# Altium PCB betaV2.1.PcbDoc (part 2 of 2)
Units mm, origin at the board's own origin, x right, y up, seen from the top; angles counter-clockwise.
Board outline 80.01 x 100.08 mm, 2 copper layers (Top Layer, Bottom Layer), stack 1.671 mm thick; 212 components, 112 nets, 564 pads, 132 vias.
Unrouted connection lines stored in the file: 45.
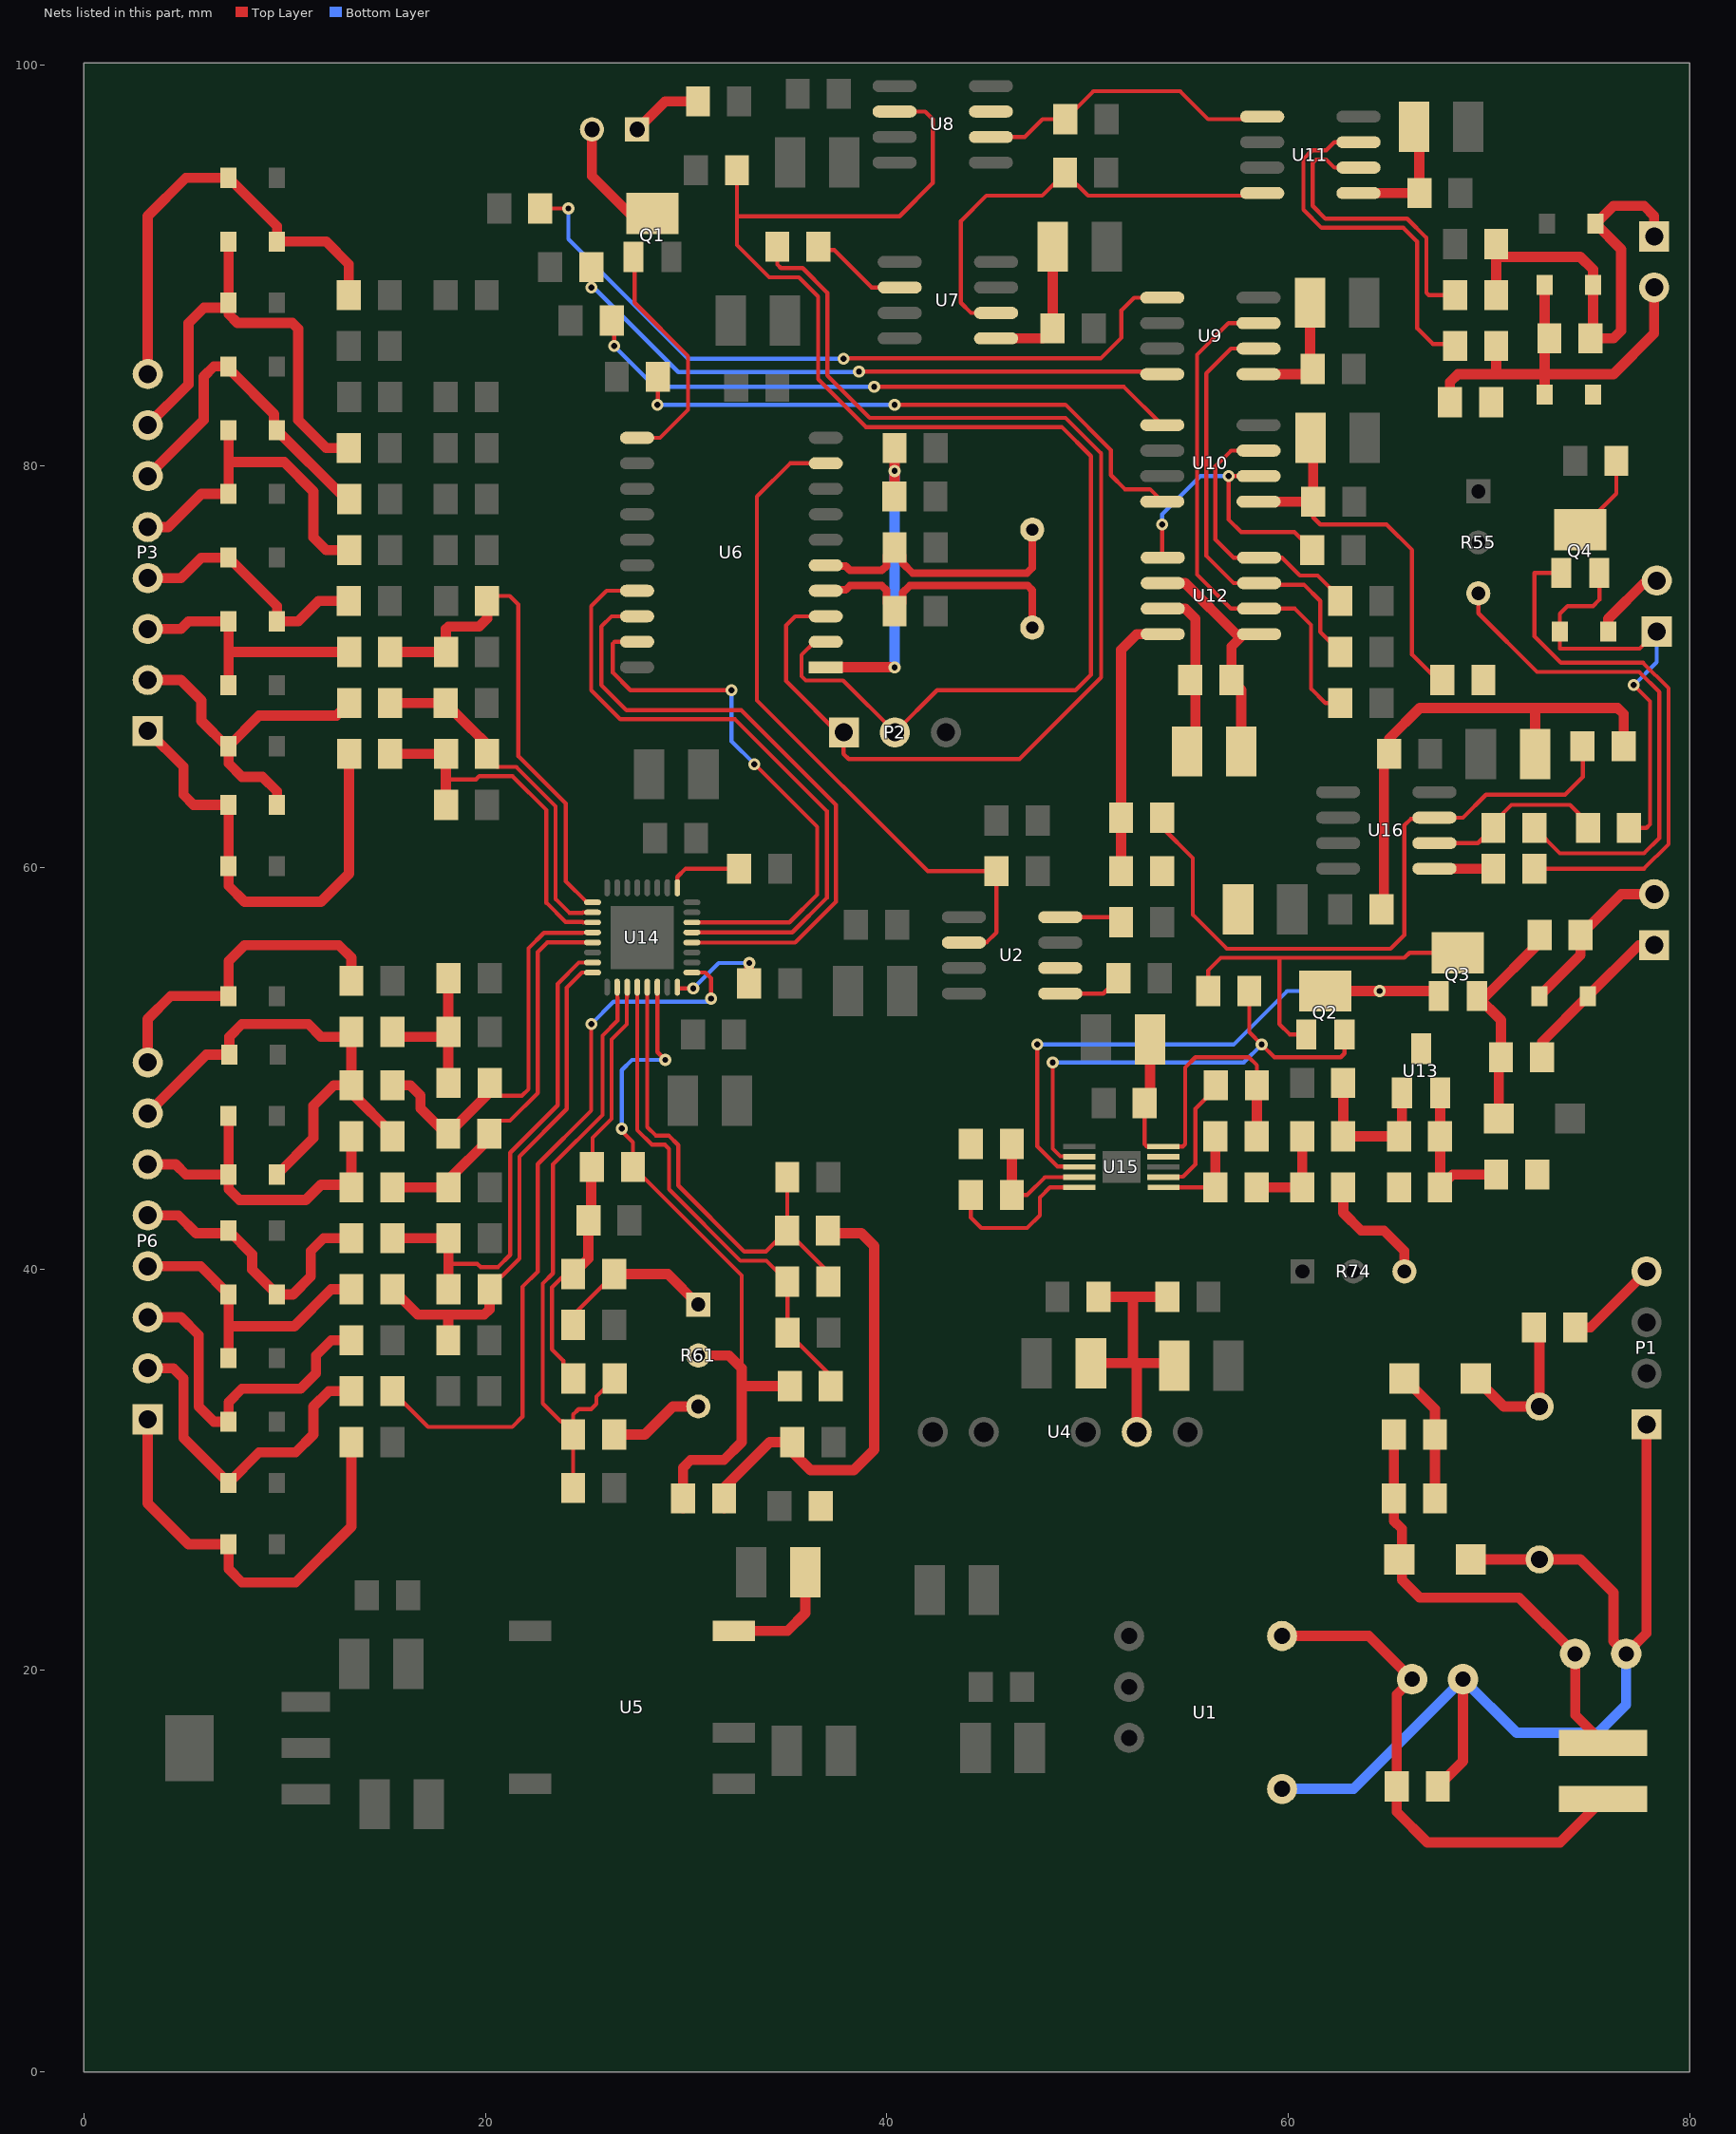
[diagram p2: the nets of this part, all layers, seen from the top]

## Via types
v1: diameter 0.6, hole 0.3, Top Layer to Bottom Layer, 118 vias
v2: diameter 0.5, hole 0.3, Top Layer to Bottom Layer, 9 vias
v3: diameter 0.3, hole 0.2, Top Layer to Bottom Layer, 5 vias

## Nets (pads, with @x,y where several pads share a name; then routed paths per layer and width w, separated by ;. In a path a pad name is that pad's centre, name@x,y a point inside that pad or via, vN(x,y) a via of type N, cw(c..) or ccw(c..) an arc to the next point about the centre after c; other vN are vias at no path point) (continued)
CHN3_P: C37.1 C38.1 R25.1 U14.9 | length 25.4
  Top Layer w0.203: C38.1@20.181,73.134 20.58,73.533 21.209,73.533 21.641,73.101 21.641,65.552 24.003,63.19 24.003,59.315 25.053,58.265 U14.9@25.338,58.265
  Top Layer w0.508: R25.1@15.256,70.739 C37.1@18.034,70.739 18.034,71.882 18.161,72.009 19.685,72.009 20.082,72.406 C38.1@20.082,73.279
CHN4_N: C35.2 C36.1 R24.1 U14.10 | length 17.5
  Top Layer w0.203: C35.2@20.082,65.659 20.082,65.509 20.58,65.01 20.699,65.01 21.536,65.01 23.495,63.051 23.495,58.431 24.183,57.743 24.831,57.743 24.848,57.76 25.333,57.76 U14.10@25.338,57.765
  Top Layer w0.508: R24.1@15.256,68.199 C36.1@18.018,68.199 18.018,68.179 19.279,66.917 19.298,66.917 20.082,66.134 C35.2@20.082,65.659
CHN4_P: C34.1 C35.1 R23.1 U14.11 | length 18.4
  Top Layer w0.203: 18.034,64.389 19.529,64.389 19.582,64.442 19.694,64.553 21.346,64.553 23.038,62.862 23.038,58.242 23.994,57.286 24.831,57.286 24.848,57.269 25.333,57.269 U14.11@25.338,57.265
  Top Layer w0.508: R23.1@15.256,65.659 C35.1@18.034,65.659 18.034,64.389 C34.1@18.034,63.119
CHN5_N: C56.2 C57.1 R46.1 U14.16 | length 26.1
  Top Layer w0.203: C56.2@20.209,38.989 20.209,39.139 20.707,39.638 20.817,39.638 21.692,40.513 21.692,45.602 24.054,47.964 24.054,54.015 24.804,54.765 U14.16@25.338,54.765
  Top Layer w0.508: R46.1@15.367,38.989 16.637,37.719 18.145,37.719 18.288,37.719 ; C57.1@18.145,36.449 18.145,37.576 18.288,37.719 ; C56.2@20.209,38.989 20.209,37.989 19.939,37.719 18.288,37.719
CHN5_P: C55.1 C56.1 R45.1 U14.15 | length 25.4
  Top Layer w0.203: 18.161,40.259 19.595,40.259 19.691,40.163 19.76,40.095 20.627,40.095 21.235,40.702 21.235,45.791 23.597,48.153 23.597,54.204 24.658,55.265 U14.15@25.338,55.265
  Top Layer w0.508: R45.1@15.367,41.529 C55.1@18.161,41.529 18.161,40.259 C56.1@18.161,38.989
CHN6_N: C70.2 C71.1 R59.2 R60.1 U14.19 | length 22
  Top Layer w0.203: C70.2@24.283,34.417 24.283,34.443 C70.2@24.384,34.544 ; R60.1@24.368,40.132 23.317,39.081 23.317,35.992 23.885,35.424 23.885,35.193 24.153,34.925 C70.2@24.384,34.925 ; R59.2@25.801,45.143 25.801,45.43 25.496,45.735 25.338,45.735 25.338,46.536 26.289,47.487 26.289,51.435 27.041,52.188 27.041,53.533 27.059,53.55 27.059,54.036 U14.19@27.063,54.04
  Top Layer w0.508: R60.1@24.368,39.751 25.13,40.513 C71.1@25.13,42.418 25.273,42.561 R59.2@25.273,45.138
CHN6_P: C69.1 C70.1 R64.1 U14.18 | length 30.7
  Top Layer w0.203: C69.1@24.368,29.464 R64.1@24.368,31.75 R64.1@24.368,31.9 ; C70.1@26.432,34.544 25.527,33.639 25.527,33.274 25.273,33.02 24.638,33.02 24.368,32.75 R64.1@24.368,31.9 ; U14.18@26.563,54.04 26.567,54.036 26.567,53.55 26.584,53.533 26.584,52.377 25.832,51.624 25.832,47.676 23.368,45.212 23.368,39.778 22.86,39.27 22.86,35.803 22.86,33.299 23.761,32.399 23.87,32.399 R64.1@24.368,31.9
CHN7_N: C73.2 C74.1 R66.1 U14.21 | length 24.2
  Top Layer w0.203: U14.21@28.063,54.04 28.063,47.069 28.484,46.648 29.131,46.648 29.607,46.172 29.607,44.155 32.893,40.868 33.978,40.868 R66.1@35.02,41.91 ; C74.1@35.036,44.577 35.036,41.926 R66.1@35.02,41.91 ; C73.2@37.084,39.37 37.084,39.846 R66.1@35.02,41.91
CHN7_P: C72.1 C73.1 R65.1 U14.20 | length 25
  Top Layer w0.203: U14.20@27.563,54.04 27.563,46.922 28.295,46.191 28.941,46.191 29.15,45.982 29.15,43.966 32.704,40.411 33.995,40.411 C73.1@35.036,39.37 35.052,39.354 C72.1@35.052,36.83 37.211,34.671 R65.1@37.211,34.163
D1: R31.2 U9.7 U12.2 | length 26.3
  Top Layer w0.203: U9.7@58.521,87.122 57.023,87.122 55.454,85.553 55.454,74.594 57.15,72.898 U12.2@58.547,72.898 60.325,72.898 61.138,72.085 61.138,68.91 61.849,68.199 R31.2@62.595,68.199
D2: R33.2 U9.6 U12.3 | length 21.7
  Top Layer w0.203: 55.911,75.534 57.277,74.168 U12.3@58.547,74.168 58.623,74.092 60.782,74.092 61.595,73.279 61.595,71.739 R33.2@62.595,70.739 ; 55.911,75.565 55.911,84.613 57.15,85.852 U9.6@58.521,85.852
D3: R32.2 U10.7 U12.4 | length 13.7
  Top Layer w0.203: U10.7@58.521,80.772 57.153,80.772 56.367,79.986 56.367,76.348 57.277,75.438 U12.4@58.547,75.438 59.69,75.438 60.579,74.549 61.468,74.549 62.595,73.422 R32.2@62.595,73.279
D4: R34.2 U10.6 U12.5 | length 14.8
  Top Layer w0.203: U12.5@53.721,75.438 U12.5@53.721,75.464 ; v1(53.721,77.089) U12.5@53.721,75.464 ; U12.5@53.747,75.438 U12.5@53.721,75.464 ; U10.6@58.521,79.502 v1(57.023,79.502) 57.023,77.343 57.658,76.708 60.309,76.708 R34.2@61.198,75.819
  Bottom Layer w0.203: v1(53.721,77.089) 53.721,77.597 55.626,79.502 v1(57.023,79.502)
DIN: U6.17 U14.29 | length 32.8
  Top Layer w0.203: U6.17@27.557,73.787 26.035,73.787 25.273,73.025 25.273,68.834 26.721,67.386 32.436,67.386 37.008,62.814 37.008,58.482 35.291,56.765 U14.29@30.288,56.765
DOUT: U6.18 U14.28 | length 31.9
  Top Layer w0.203: U6.18@27.557,72.517 26.289,72.517 25.781,72.009 25.781,69.088 27.026,67.843 32.741,67.843 34.544,66.04 37.465,63.119 37.465,58.293 35.433,56.261 30.292,56.261 U14.28@30.288,56.265
Iout: D19.2 P5.2 R40.1 | length 8.4
  Top Layer w0.508: D19.2@72.517,53.594 74.565,55.642 R40.1@74.565,56.642 76.597,58.674 P5.2@78.232,58.674
IS: Q2.3 R41.2 U15.2 | length 24.9
  Top Layer w0.203: v1(48.26,50.292) 48.26,45.992 48.642,45.61 49.572,45.61 U15.2@49.589,45.593 ; R41.2@58.055,53.848 58.055,51.8 v1(58.674,51.181) 59.309,50.546 62.611,50.546 62.799,50.734 Q2.3@62.799,51.689
  Bottom Layer w0.203: v1(48.26,50.292) 57.785,50.292 v1(58.674,51.181)
NetC4_2: C4.2 R2.2 U6.1 | length 15.6
  Top Layer w0.508: U6.1@36.957,69.977 v1(40.386,69.977) ; R2.2@40.37,78.486 40.386,78.502 v1(40.386,79.756) C4.2@40.386,80.899
  Bottom Layer w0.508: v1(40.386,69.977) v1(40.386,79.756)
NetC13_1: C13.1 D3.2 L1.1 R8.1 R9.1 | length 22.6
  Top Layer w0.508: R9.1@65.262,31.75 R8.1@65.262,28.575 65.262,27.448 65.659,27.051 65.659,25.273 65.659,24.511 66.548,23.622 71.501,23.622 C13.1@74.295,20.828 74.295,17.78 L1.1@75.692,16.383
NetC48_1: C48.1 D22.1 Q3.3 R40.2 | length 11.2
  Top Layer w0.508: D22.1@70.485,47.498 70.485,50.435 C48.1@70.596,50.546 70.596,52.401 Q3.3@69.403,53.594 69.85,53.594 72.517,56.261 R40.2@72.517,56.642
NetC51_1: C51.1 C52.2 R50.1 R54.2 | length 8
  Top Layer w0.508: R50.1@15.367,51.562 C51.1@18.145,51.562 ; R54.2@18.145,54.229 C51.1@18.145,51.562 ; C52.2@18.161,49.022 18.145,49.038 C51.1@18.145,51.562
NetC62_2: C62.2 U14.1 | length 4
  Top Layer w0.203: U14.1@29.563,58.99 29.563,59.535 29.972,59.944 C62.2@32.893,59.944
NetC65_1: C65.1 R57.1 U16.3 | length 33.4
  Top Layer w0.203: R57.1@53.737,61.976 55.245,60.468 55.245,57.65 56.939,55.956 65.1,55.956 65.786,56.642 65.786,62.103 66.101,62.418 67.218,62.418 U16.3@67.284,62.484 68.707,62.484 69.85,63.627 73.787,63.627 74.676,64.516 74.676,66.024 C65.1@74.66,66.04
NetC75_2: C75.2 R70.2 R71.2 U15.6 | length 5.1
  Top Layer w0.203: U15.6@53.789,44.069 R71.2@56.372,44.069
  Top Layer w0.508: R71.2@56.372,44.069 C75.2@56.372,46.609
NetC76_2: C76.2 U14.24 | length 5.2
  Top Layer w0.203: U14.24@29.563,54.04 29.628,53.975 v1(30.353,53.975)
  Top Layer w0.508: C76.2@33.131,54.229 33.131,55.229 v1(33.147,55.245)
  Bottom Layer w0.203: v1(30.353,53.975) 31.623,55.245 v1(33.147,55.245)
NetD1_1: D1.1 R1.2 | length 3.6
  Top Layer w0.508: D1.1@27.559,96.774 28.956,98.171 R1.2@30.591,98.171
NetD1_2: D1.2 Q1.1 | length 6.1
  Top Layer w0.508: D1.2@25.309,96.774 25.309,94.452 27.178,92.583 Q1.1@28.321,92.583
NetD2_1: D2.1 F1.2 R5.2 | length 7.8
  Top Layer w0.508: D2.1@69.342,34.544 70.739,33.147 R5.2@72.517,33.147 72.517,36.814 F1.2@72.247,37.084
NetD2_2: D2.2 R8.2 R9.2 | length 6.6
  Top Layer w0.508: D2.2@65.786,34.544 67.31,33.02 R9.2@67.31,31.75 R8.2@67.31,28.575
NetD4_1: D4.1 D18.2 P4.1 R18.2 R20.2 R22.2 | length 23.2
  Top Layer w0.508: R18.2@70.358,88.519 70.358,90.297 ; R20.2@70.358,91.059 70.358,90.297 ; P4.1@78.232,91.44 78.232,92.456 77.724,92.964 76.2,92.964 D4.1@75.311,92.075 76.581,90.805 76.581,86.741 76.2,86.36 R22.2@75.057,86.36 75.184,86.487 D18.2@75.184,89.027 75.184,89.789 74.549,90.424 70.485,90.424 70.358,90.297
NetD5_2: D5.2 D18.1 P4.2 R19.1 R21.2 R22.1 | length 21.5
  Top Layer w0.508: R21.2@68.056,83.185 68.056,84.185 68.453,84.582 70.358,84.582 ; R19.1@70.358,85.979 70.358,84.582 ; D5.2@72.771,83.566 72.771,84.582 ; D18.1@72.771,89.027 72.771,86.598 R22.1@73.009,86.36 72.771,86.122 72.771,84.582 ; P4.2@78.232,88.9 78.232,86.614 76.2,84.582 72.771,84.582 ; 70.358,84.582 72.771,84.582
NetD6_2: D6.2 D7.2 P3.1 R23.2 | length 23.3
  Top Layer w0.508: P3.1@3.175,66.802 4.953,65.024 4.953,63.627 5.461,63.119 D7.2@7.201,63.119 D6.2@7.201,60.071 7.201,59.093 8.001,58.293 11.811,58.293 13.208,59.69 R23.2@13.208,65.659
NetD7_1: D7.1 D8.2 P3.2 R24.2 | length 17.4
  Top Layer w0.508: P3.2@3.175,69.342 4.826,69.342 5.842,68.326 5.842,67.31 7.112,66.04 D8.2@7.201,66.04 ; D7.1@9.614,63.119 9.614,63.792 8.89,64.516 7.874,64.516 7.201,65.189 D8.2@7.201,66.04 ; R24.2@13.208,68.199 12.573,67.564 8.725,67.564 D8.2@7.201,66.04
NetD9_2: D9.2 D10.2 P3.3 R25.2 | length 13.4
  Top Layer w0.508: P3.3@3.175,71.882 4.826,71.882 5.207,72.263 D10.2@7.201,72.263 7.201,70.675 ; D9.2@7.201,69.088 7.201,70.675 ; R25.2@13.208,70.739 7.265,70.739 7.201,70.675
NetD10_1: D10.1 D11.2 P3.4 R26.2 | length 12.6
  Top Layer w0.508: P3.4@3.175,74.422 4.826,74.422 5.842,75.438 D11.2@7.201,75.438 9.614,73.025 D10.1@9.614,72.263 10.668,72.263 11.684,73.279 R26.2@13.192,73.279
NetD12_2: D12.2 D13.2 P3.5 R27.2 | length 17
  Top Layer w0.508: P3.5@3.175,76.962 4.191,76.962 5.842,78.613 D12.2@7.201,78.613 7.201,80.2 ; D13.2@7.201,81.788 7.201,80.2 ; R27.2@13.208,75.819 12.065,75.819 11.43,76.454 11.43,78.74 9.97,80.2 7.201,80.2
NetD13_1: D13.1 D14.2 P3.6 R28.2 | length 16.7
  Top Layer w0.508: P3.6@3.175,79.502 5.969,82.296 5.969,84.455 6.477,84.963 D14.2@7.201,84.963 7.347,84.817 7.347,84.717 9.468,82.596 9.468,81.934 13.043,78.359 R28.2@13.208,78.359
NetD15_2: D15.2 D16.2 P3.7 R29.2 | length 23.3
  Top Layer w0.508: P3.7@3.175,82.042 5.207,84.074 5.207,87.122 5.977,87.892 7.055,87.892 D15.2@7.201,88.038 ; D16.2@7.201,91.186 D15.2@7.201,88.138 D15.2@7.201,88.038 ; R29.2@13.192,80.899 12.065,80.899 10.668,82.296 10.668,86.832 10.37,87.13 7.645,87.13 7.201,87.574 D15.2@7.201,88.038
NetD16_1: D16.1 D17.2 P3.8 R30.2 | length 22.4
  Top Layer w0.508: P3.8@3.175,84.582 3.175,92.456 5.08,94.361 D17.2@7.201,94.361 9.614,91.948 D16.1@9.614,91.186 12.065,91.186 13.192,90.059 R30.2@13.192,88.519
NetD20_2: D20.2 D21.2 P6.7 R42.2 R50.2 R51.2 | length 25.1
  Top Layer w0.508: P6.7@3.175,47.752 6.096,50.673 D20.2@7.239,50.673 7.239,51.562 7.874,52.197 11.176,52.197 11.811,51.562 13.319,51.562 R51.2@13.319,49.149 ; D21.2@9.614,44.704 11.43,46.52 11.43,48.133 12.446,49.149 R51.2@13.319,49.149 ; R42.2@15.367,46.609 15.367,46.736 13.319,48.784 R51.2@13.319,49.149
NetD21_1: D21.1 D24.2 P6.6 R42.1 R52.2 | length 17.1
  Top Layer w0.508: P6.6@3.175,45.212 4.572,45.212 5.08,44.704 D21.1@7.201,44.704 ; D24.2@7.201,47.625 D21.1@7.201,44.704 ; R42.1@13.319,46.609 R52.2@13.319,44.069 13.192,44.196 11.811,44.196 11.049,43.434 7.747,43.434 7.201,43.98 D21.1@7.201,44.704
NetD23_2: D23.2 P6.8 R53.2 | length 16.3
  Top Layer w0.508: P6.8@3.175,50.292 3.175,52.451 4.318,53.594 D23.2@7.201,53.594 7.201,55.334 8.001,56.134 12.7,56.134 13.335,55.499 13.319,55.483 R53.2@13.319,54.356
NetD25_2: D25.2 D26.2 P6.5 R45.2 | length 14.2
  Top Layer w0.508: P6.5@3.175,42.672 4.699,42.672 5.588,41.783 7.074,41.783 D25.2@7.201,41.91 8.382,40.729 8.382,39.967 D26.2@9.614,38.735 10.414,38.735 11.303,39.624 11.303,40.894 11.938,41.529 R45.2@13.319,41.529
NetD26_1: D26.1 D27.2 P6.4 R46.2 | length 14.7
  Top Layer w0.508: P6.4@3.175,40.132 5.804,40.132 D26.1@7.201,38.735 7.201,37.148 ; D27.2@7.201,35.56 7.201,37.148 ; R46.2@13.319,38.989 12.319,38.989 10.477,37.148 7.201,37.148
NetD28_2: D28.2 P6.3 R47.2 | length 17.2
  Top Layer w0.508: P6.3@3.175,37.592 4.826,37.592 5.715,36.703 5.715,33.147 6.477,32.385 D28.2@7.201,32.385 7.201,33.363 7.874,34.036 10.795,34.036 11.557,34.798 11.557,35.687 12.319,36.449 R47.2@13.319,36.449
NetD29_2: D29.2 P6.2 R48.2 | length 17
  Top Layer w0.508: P6.2@3.175,35.052 4.445,35.052 4.953,34.544 4.953,31.585 D29.2@7.201,29.337 8.725,30.861 10.541,30.861 11.43,31.75 11.43,33.147 12.192,33.909 R48.2@13.319,33.909
NetD30_2: D30.2 P6.1 R49.2 | length 22
  Top Layer w0.508: P6.1@3.175,32.512 3.175,28.321 5.207,26.289 D30.2@7.201,26.289 7.201,25.057 7.874,24.384 10.541,24.384 13.319,27.162 R49.2@13.319,31.369
NetD31_2: D31.2 P7.1 Q4.3 R63.1 | length 22.1
  Top Layer w0.203: Q4.3@75.499,74.676 75.499,73.34 75.184,73.025 73.914,73.025 73.533,72.644 D31.2@73.533,71.755 73.533,70.899 77.503,70.899 P7.1@78.359,71.755 ; R63.1@76.978,61.976 77.851,61.976 78.029,62.154 78.029,68.275 v1(77.216,69.088)
  Bottom Layer w0.203: v1(77.216,69.088) 78.359,70.231 P7.1@78.359,71.755
NetF1_1: F1.1 P1.4 | length 4.7
  Top Layer w0.508: F1.1@74.295,37.084 75.057,37.084 P1.4@77.851,39.878
NetNTC1_1: NTC1.1 R58.2 R66.2 | length 23.5
  Top Layer w0.508: NTC1.1@31.893,28.067 31.893,29.099 34.163,31.369 R58.2@35.29,31.369 35.29,30.877 36.195,29.972 38.354,29.972 39.37,30.988 39.37,41.148 38.735,41.783 37.195,41.783 R66.2@37.068,41.91
NetP2_1: P2.1 R7.1 U6.3 | length 58.9
  Top Layer w0.203: R7.1@34.544,90.932 34.544,90.043 34.722,89.865 35.806,89.865 37.033,88.638 37.033,84.517 39.148,82.402 48.904,82.402 50.673,80.634 50.673,69.469 46.609,65.405 38.1,65.405 37.846,65.659 37.846,66.421 34.976,69.291 34.976,72.06 35.433,72.517 U6.3@36.957,72.517
NetP2_2: P2.2 R6.1 U6.2 U8.6 | length 74
  Top Layer w0.203: R6.1@32.528,94.742 32.528,92.448 ; U6.2@36.957,71.247 36.407,71.247 35.751,70.591 35.751,69.53 35.96,69.321 37.816,69.321 P2.2@40.402,66.735 42.502,68.834 49.392,68.834 50.165,69.607 50.165,80.495 48.715,81.946 38.958,81.946 36.576,84.328 36.576,88.449 35.617,89.408 34.136,89.408 32.528,91.016 32.528,92.448 ; U8.6@40.386,97.663 41.91,97.663 42.291,97.282 42.291,94.107 40.632,92.448 32.528,92.448
NetQ2_2: Q2.2 Q3.2 R41.1 | length 18.7
  Top Layer w0.203: R41.1@56.007,53.848 56.007,54.864 56.642,55.499 59.563,55.499 ; Q2.2@60.899,51.689 60.071,51.689 59.563,52.197 59.563,55.499 ; Q3.2@68.453,55.753 66.04,55.753 65.786,55.499 59.563,55.499
NetQ4_1: Q4.1 R68.2 | length 4.2
  Top Layer w0.203: Q4.1@74.549,76.835 76.343,78.629 R68.2@76.343,80.264
NetQ4_2: Q4.2 R67.1 | length 27.2
  Top Layer w0.203: R67.1@72.263,59.944 77.724,59.944 78.943,61.163 78.943,68.934 77.677,70.2 73.586,70.2 72.263,71.523 72.263,74.676 Q4.2@73.599,74.676
NetR3_1: R3.1 U2.1 | length 3.2
  Top Layer w0.203: U2.1@48.641,53.721 50.784,53.721 R3.1@51.546,54.483
NetR4_1: R4.1 U2.4 | length 3.1
  Top Layer w0.203: U2.4@48.641,57.531 51.419,57.531 R4.1@51.673,57.277
NetR7_2: R7.2 U7.2 | length 4.7
  Top Layer w0.203: R7.2@36.83,90.932 36.997,90.765 37.378,90.765 39.243,88.9 U7.2@40.64,88.9
NetR14_1: R14.1 U9.1 | length 37
  Top Layer w0.203: R14.1@22.733,92.837 v1(24.13,92.837) ; v1(37.846,85.344) 37.867,85.365 50.657,85.365 51.689,86.396 51.689,87.757 52.324,88.392 U9.1@53.721,88.392
  Bottom Layer w0.203: v1(24.13,92.837) 24.13,91.313 30.099,85.344 v1(37.846,85.344)
NetR15_1: R15.1 U9.4 | length 31
  Top Layer w0.203: v1(25.273,88.9) 25.273,89.878 25.292,89.897 R15.1@25.273,89.916 ; v1(38.608,84.709) 53.34,84.709 U9.4@53.467,84.582
  Bottom Layer w0.203: v1(25.273,88.9) 25.4,88.9 29.612,84.688 38.587,84.688 v1(38.608,84.709)
NetR16_1: R16.1 U10.1 | length 30.3
  Top Layer w0.203: R16.1@26.289,87.249 26.416,87.122 v1(26.416,85.979) ; v1(39.37,83.947) 51.816,83.947 U10.1@53.721,82.042
  Bottom Layer w0.203: v1(26.416,85.979) 28.448,83.947 v1(39.37,83.947)
NetR17_1: R17.1 U10.4 | length 29.3
  Top Layer w0.203: v1(28.575,83.058) 28.591,83.074 R17.1@28.591,84.455 ; v1(40.386,83.058) 48.895,83.058 51.16,80.793 51.16,79.55 51.864,78.846 53.107,78.846 U10.4@53.721,78.232
  Bottom Layer w0.203: v1(28.575,83.058) v1(40.386,83.058)
NetR36_1: R36.1 R37.2 R38.1 U13.2 | length 7.8
  Top Layer w0.508: U13.2@67.564,48.768 R37.2@67.564,46.609 R36.1@67.564,44.069 68.199,44.704 R38.1@70.358,44.704
NetR55_3: R55.3 R56.2 | length 26
  Top Layer w0.203: R55.3@69.469,73.66 69.469,72.668 72.393,69.744 77.488,69.744 78.486,68.745 78.486,61.468 77.724,60.706 73.533,60.706 R56.2@72.263,61.976
NetR56_1: R56.1 R63.2 U16.2 | length 9.2
  Top Layer w0.203: U16.2@67.284,61.214 69.453,61.214 R56.1@70.215,61.976 70.215,62.214 71.12,63.119 74.041,63.119 74.93,62.23 R63.2@74.93,61.976
NetR60_2: R60.2 R61.1 R62.2 | length 8.2
  Top Layer w0.203: R62.2@24.368,37.211 24.368,37.703 R60.2@26.416,39.751
  Top Layer w0.508: R60.2@26.416,39.751 29.083,39.751 R61.1@30.607,38.227
NetR61_3: R61.3 R64.2 | length 4.8
  Top Layer w0.508: R64.2@26.416,31.75 27.94,31.75 29.337,33.147 R61.3@30.607,33.147
NetR67_2: R67.2 U16.1 | length 2.9
  Top Layer w0.508: U16.1@67.284,59.944 R67.2@70.215,59.944
NetR69_2: R69.2 U15.7 | length 6.2
  Top Layer w0.203: U15.7@53.78,44.577 53.797,44.594 54.754,44.594 55.372,45.212 55.372,47.983 56.388,48.999 R69.2@56.388,49.149
NetR71_1: R71.1 R72.2 R73.1 | length 4.8
  Top Layer w0.508: R71.1@58.42,44.069 R73.1@60.69,44.069 R72.2@60.69,46.609
NetR73_2: R73.2 R74.3 | length 6.1
  Top Layer w0.508: R73.2@62.738,44.069 62.738,42.799 63.627,41.91 64.77,41.91 65.786,40.894 R74.3@65.786,39.878
PowerOK: Q1.2 U6.11 | length 11.9
  Top Layer w0.203: Q1.2@27.371,90.424 27.432,90.363 27.432,88.138 30.099,85.471 30.099,82.804 28.702,81.407 U6.11@27.557,81.407
PSW: R48.1 U14.25 | length 37
  Top Layer w0.203: R48.1@15.367,33.909 17.145,32.131 21.336,32.131 21.844,32.639 21.844,39.105 22.606,39.867 22.606,45.223 25.273,47.89 v1(25.273,52.197) ; U14.25@30.288,54.765 30.96,54.765 31.242,54.483 v1(31.242,53.467)
  Bottom Layer w0.203: v1(25.273,52.197) 26.395,53.319 31.094,53.319 v1(31.242,53.467)
REFIN1_N: C53.2 C54.1 R52.1 U14.13 | length 19.6
  Top Layer w0.203: C53.2@20.193,46.736 20.193,46.886 20.692,47.385 21.223,47.385 22.606,48.768 22.606,55.791 23.08,56.265 U14.13@25.338,56.265
  Top Layer w0.508: R52.1@15.367,44.069 C54.1@18.161,44.069 18.161,44.45 20.193,46.482 C53.2@20.193,46.736
REFIN1_P: C52.1 C53.1 R51.1 U14.12 | length 20.1
  Top Layer w0.203: C52.1@20.379,48.956 20.707,48.627 21.819,48.627 22.149,48.957 22.149,55.98 22.912,56.743 24.831,56.743 24.848,56.76 25.333,56.76 U14.12@25.338,56.765
  Top Layer w0.508: R51.1@15.367,49.149 16.256,49.149 16.764,48.641 16.764,48.006 18.034,46.736 C53.1@18.145,46.736 20.209,48.8 C52.1@20.209,49.276
REFOUT: NTC1.2 R59.1 R61.2 R65.2 U14.22 | length 37.5
  Top Layer w0.203: v1(26.797,46.99) 26.797,46.863 27.35,46.31 R59.1@27.35,45.087 32.766,39.671 32.766,35.052 ; U14.22@28.563,54.04 28.567,54.035 28.567,50.808 v1(28.956,50.419)
  Top Layer w0.508: NTC1.2@29.845,28.067 29.845,30.099 30.226,30.48 31.877,30.48 32.766,31.369 32.766,34.163 ; R61.2@30.607,35.687 32.131,35.687 32.766,35.052 32.766,34.163 ; R65.2@35.163,34.163 32.766,34.163
  Bottom Layer w0.203: v1(26.797,46.99) 26.797,49.911 27.305,50.419 v1(28.956,50.419)
RS485_N: R19.2 U11.7 | length 18.5
  Top Layer w0.203: U11.7@63.5,96.139 62.299,96.139 61.892,95.732 61.188,95.732 60.757,95.301 60.757,92.775 61.66,91.872 65.735,91.872 66.421,91.186 66.421,86.868 67.209,86.08 68.209,86.08 R19.2@68.31,85.979
RS485_P: R18.1 U11.6 | length 15.2
  Top Layer w0.203: U11.6@63.5,94.869 62.299,94.869 61.892,95.275 61.378,95.275 61.214,95.112 61.214,92.964 61.849,92.329 65.924,92.329 66.878,91.375 66.878,88.638 66.997,88.519 R18.1@68.31,88.519
RxD: R12.1 U8.2 U11.1 | length 16
  Top Layer w0.203: U8.2@45.186,96.393 46.863,96.393 47.752,97.282 R12.1@48.895,97.282 50.292,98.679 54.61,98.679 56.007,97.282 58.573,97.282 U11.1@58.7,97.409 U11.1@57.785,97.409
SCLK: U6.19 U14.30 | length 27.7
  Top Layer w0.203: U6.19@27.557,71.247 26.439,71.247 26.351,71.159 26.351,69.705 27.223,68.834 v1(32.258,68.834) ; U14.30@30.288,57.265 35.144,57.265 36.525,58.646 36.525,62.027 v1(33.401,65.151)
  Bottom Layer w0.203: v1(32.258,68.834) 32.258,66.294 v1(33.401,65.151)
SGND: C16.2 C22.1 C23.2 C25.2 C28.2 C29.2 C30.2 C31.2 C32.2 C33.2 D5.1 R21.1 R39.1 U2.2 U5.4 U7.5 U8.3 U9.5 U10.5 U11.5 | length 45.2
  Top Layer w0.203: C31.2@61.238,78.232 61.238,77.446 61.595,77.089 64.897,77.089 66.167,75.819 66.167,70.612 67.437,69.342 R39.1@67.675,69.342
  Top Layer w0.508: U5.4@32.385,21.971 35.052,21.971 35.941,22.86 C16.2@35.941,24.892 ; U7.5@45.44,86.36 47.752,86.36 C25.2@48.26,86.868 C23.2@48.26,90.932 ; U10.5@58.521,78.232 C31.2@61.238,78.232 61.238,81.28 C33.2@61.111,81.407 ; U9.5@58.521,84.582 60.96,84.582 C30.2@61.214,84.836 61.087,84.963 C32.2@61.087,88.138 ; U11.5@63.5,93.599 C29.2@66.532,93.599 66.532,96.63 C28.2@66.261,96.901
TxD: R10.1 U7.6 U11.4 | length 22.6
  Top Layer w0.203: U7.6@45.44,87.63 44.196,87.63 43.688,88.138 43.688,92.202 44.958,93.472 47.736,93.472 R10.1@48.879,94.615 50.022,93.472 58.573,93.472 U11.4@58.7,93.599
VBIAS: R35.2 R37.1 R72.1 U13.1 | length 7.7
  Top Layer w0.508: R35.2@62.738,49.276 R72.1@62.738,46.609 R37.1@65.516,46.609 65.664,46.757 U13.1@65.664,48.768
VG: Q2.1 Q3.1 U15.3 | length 31.7
  Top Layer w0.203: v1(47.498,51.181) 47.498,46.108 48.503,45.102 49.572,45.102 U15.3@49.589,45.085
  Top Layer w0.508: Q2.1@61.849,53.848 v1(64.549,53.848) 67.249,53.848 Q3.1@67.503,53.594
  Bottom Layer w0.203: v1(47.498,51.181) 57.277,51.181 59.944,53.848 v1(64.549,53.848) v1@64.77,53.848
VIN+: C21.1 C24.1 L1.2 U1.4 | length 26.1
  Top Layer w0.508: U1.4@59.69,21.717 64.008,21.717 C21.1@66.167,19.558 65.405,18.796 C24.1@65.405,14.224 65.405,12.954 66.929,11.43 73.539,11.43 L1.2@75.692,13.583
VIN-: C13.2 C21.2 C24.2 D3.1 P1.1 R5.1 U1.1 | length 52.4
  Top Layer w0.508: C24.2@67.453,14.224 68.707,15.478 C21.2@68.707,19.558 ; D3.1@69.215,25.273 69.469,25.527 72.771,25.527 74.549,25.527 76.2,23.876 76.2,21.463 C13.2@76.835,20.828 77.851,21.844 P1.1@77.851,32.258
  Bottom Layer w0.508: U1.1@59.69,14.097 63.246,14.097 C21.2@68.707,19.558 71.374,16.891 75.438,16.891 76.835,18.288 C13.2@76.835,20.828
VOUT: R57.2 R70.1 U12.8 | length 13.4
  Top Layer w0.508: R70.1@51.673,59.817 R57.2@51.673,62.484 51.673,70.85 52.451,71.628 U12.8@53.747,71.628
VREGF: C46.1 C47.2 R43.1 U12.1 U12.6 U15.5 | length 20.3
  Top Layer w0.203: R43.1@44.18,43.688 44.18,42.561 44.704,42.037 46.99,42.037 47.625,42.672 47.625,43.561 48.133,44.069 U15.5@49.589,44.069
  Top Layer w0.508: U12.6@53.747,74.168 54.864,74.168 57.404,71.628 U12.1@57.785,71.628 ; C46.1@57.658,65.786 57.658,68.85 C47.2@57.166,69.342 57.166,71.009 U12.1@57.785,71.628 ; U12.1@58.547,71.628 U12.1@57.785,71.628
VREGS: R43.2 R44.1 U15.4 | length 6.3
  Top Layer w0.203: R43.2@46.228,43.688 46.99,43.688 47.879,44.577 U15.4@49.589,44.577
  Top Layer w0.508: R43.2@46.228,43.688 R44.1@46.228,46.228
XTAL_N: C5.1 U6.5 Y1.1 | length 13.9
  Top Layer w0.381: U6.5@36.957,75.057 36.999,75.015 37.95,75.015 38.162,74.803 39.753,74.803 39.976,75.026 39.976,75.536 C5.1@40.386,75.946 40.796,75.536 40.796,75.156 41.275,74.676 46.984,74.676 47.244,74.936 Y1.1@47.244,76.835
XTAL_P: C2.1 U6.4 Y1.2 | length 14.1
  Top Layer w0.381: U6.4@36.957,73.787 36.999,73.829 37.95,73.829 38.162,74.041 39.753,74.041 39.976,73.818 39.976,73.181 C2.1@40.386,72.771 40.796,73.181 40.796,73.689 41.148,74.041 47.021,74.041 47.244,73.818 Y1.2@47.244,71.955
±15VGND: C17.2 C18.2 C19.2 C20.1 C46.2 C47.1 C48.2 C49.2 C50.2 C59.1 C60.1 C61.2 C63.1 C65.2 C75.1 D19.1 D31.1 P5.1 P7.2 R36.2 R38.2 R39.2 R44.2 R69.1 U4.5 U12.7 U13.3 U15.9 U15.10 | length 79
  Top Layer w0.203: C60.1@52.848,48.26 52.848,46.212 52.959,46.101 54.745,46.101 54.864,46.22 54.864,50.038 55.372,50.546 58.039,50.546 58.436,50.149 R69.1@58.436,49.149
  Top Layer w0.508: C20.1@50.165,35.306 52.07,35.306 ; C19.2@50.546,38.608 52.261,38.608 ; U4.5@52.451,31.877 52.451,35.306 ; C60.1@52.848,48.26 53.119,48.531 C50.2@53.119,51.435 ; U12.7@53.747,72.898 54.864,72.898 55.372,72.39 55.372,66.2 C46.2@54.958,65.786 ; C18.2@53.975,38.608 52.261,38.608 ; C17.2@54.323,35.179 54.196,35.306 52.451,35.306 ; C75.1@58.42,46.609 58.436,46.625 R69.1@58.436,49.149 ; C59.1@64.643,57.912 64.77,58.039 64.77,65.405 C63.1@65.024,65.659 65.024,66.421 66.548,67.945 72.296,67.945 ; C61.2@72.296,65.659 72.296,67.945 ; C48.2@72.644,50.546 72.644,51.308 D19.1@74.93,53.594 77.47,56.134 P5.1@78.232,56.134 ; D31.1@75.946,71.755 75.946,72.39 77.851,74.295 P7.2@78.359,74.295 ; C65.2@76.708,66.04 76.708,67.647 76.41,67.945 72.296,67.945 ; 52.07,35.306 52.451,35.306 ; 52.07,35.306 52.261,35.496 52.261,38.608
±15VON: R13.2 U2.6 U6.9 | length 34.6
  Top Layer w0.203: U6.9@36.957,80.137 35.179,80.137 33.528,78.486 33.528,68.326 42.037,59.817 R13.2@45.466,59.817 45.466,56.769 44.958,56.261 U2.6@43.841,56.261
pads on no net: P1.2 P1.3 U1.6 U3.4 U5.8 U6.6 U6.7 U7.1 U7.4 U7.7 U8.1 U8.4 U8.7 U14.27 U14.31 U14.33 U15.8 U15.12 U16.5 U16.6 U16.7
copper on no net:
  other v2: 26.813,55.515 27.813,55.515 28.813,55.515 26.813,56.515 27.813,56.515 28.813,56.515 26.813,57.515 27.813,57.515 28.813,57.515
  other v3: 51.113,44.577 52.256,44.577 51.689,45.085 51.113,45.593 52.256,45.593

## Polygon pours and split planes (outlines as drawn)
3.3VCC on Top Layer "3.3VCC_L01_P022" (hatched 90Degree grid 0.508 track 0.203, pour order 22): 29.464,87.503 31.115,85.852 31.115,83.312 33.02,83.312 33.02,89.154 29.464,89.154
3.3VCC on Top Layer "3.3VCC_L01_P019" (hatched 90Degree grid 0.508 track 0.203, pour order 19): 30.226,65.913 31.75,65.913 34.417,63.246 34.417,62.23 32.766,62.23 30.861,60.325 30.226,60.325
5VDD on Top Layer "5VDD_L01_P015" (hatched 90Degree grid 0.508 track 0.203, pour order 15): 32.004,25.781 32.639,25.781 34.036,27.178 34.036,29.083 35.179,29.083 35.179,27.305 33.909,26.035 33.909,23.622 32.004,23.622
SGND on Top Layer "SGND_L01_P014" (hatched 90Degree grid 0.508 track 0.203, pour order 14): 38.608,28.956 36.068,28.956 36.068,26.924 35.179,26.035 35.179,23.241 38.608,23.241
SGND on Top Layer "SGND_L01_P013" (hatched 90Degree grid 0.508 track 0.203, pour order 13): 35.179,26.035 35.179,23.241 34.671,22.733 29.591,22.733 28.956,22.098 28.956,21.463 29.464,20.955 37.465,20.955 38.608,22.098 38.608,26.035
5VDD on Top Layer "5VDD_L01_P012" (hatched 90Degree grid 0.508 track 0.203, pour order 12): 20.066,20.955 20.066,24.257 21.844,26.035 33.909,26.035 33.909,23.622 25.654,23.622 24.384,22.352 24.384,20.955
5VIN- on Top Layer "5VIN-_L01_P009" (hatched 90Degree grid 0.508 track 0.203, pour order 9): 15.57,21.488 15.57,27.127 16.002,27.559 17.526,27.559 17.907,27.178 17.907,21.463
5VIN- on Top Layer "5VIN-_L01_P008" (hatched 90Degree grid 0.508 track 0.203, pour order 8): 9.271,29.718 9.525,29.972 11.811,29.972 11.811,27.178 10.414,25.781 9.271,25.781
5VIN- on Top Layer "5VIN-_L01_P005" (hatched 90Degree grid 0.508 track 0.203, pour order 5): 19.431,12.192 20.066,12.827 20.066,15.748 19.812,16.002 12.827,16.002 12.573,16.256 12.573,16.383 12.7,16.51 17.907,16.51 18.669,17.272 18.669,19.558 17.907,20.32 17.907,21.463 15.367,21.463 15.367,18.161 14.732,17.526 12.7,17.526 12.319,17.145 9.271,17.145 9.017,16.891 9.017,15.494 9.271,15.24 15.875,15.24 16.383,14.732 16.383,12.192
5VIN on Top Layer "5VIN_L01_P002" (hatched 90Degree grid 0.508 track 0.203, pour order 2): 41.148,11.43 24.714,11.43 24.714,10.922 42.037,10.922 43.815,12.7 43.815,15.748 43.942,15.875 44.704,15.875 44.704,14.351 44.958,14.097 44.958,12.573 46.101,11.43 54.229,11.43 56.261,13.462 56.261,24.13 54.864,25.527 49.784,25.527 49.149,24.892 49.149,21.717 50.165,20.701 53.594,20.701 54.229,20.066 54.229,15.24 52.578,13.589 46.355,13.589 45.212,14.732 45.212,20.32 43.18,22.352 43.18,33.02 42.672,33.528 41.402,33.528 40.767,32.893 40.767,28.448 40.132,27.813 40.132,20.447 42.672,17.907 42.672,17.145 42.037,17.145 39.116,20.066 30.353,20.066 29.464,19.177 29.464,17.145 30.099,16.51 33.274,16.51 33.274,18.034 33.528,18.288 36.322,18.288 37.084,17.526 37.084,12.7 37.465,12.319 39.497,12.319 42.799,15.621 43.053,15.367 43.053,15.113 42.418,14.478 42.418,12.7
5VIN- on Top Layer "5VIN-_L01_P003" (hatched 90Degree grid 0.508 track 0.203, pour order 3): 53.34,15.494 52.07,14.224 47.371,14.224 46.482,15.113 46.482,20.701 44.196,22.987 44.196,33.147 44.704,33.655 45.72,33.655 48.006,31.369 48.006,21.59 48.895,20.701 48.895,18.161 49.657,17.399 52.832,17.399 53.34,16.891
5VIN on Top Layer "5VIN_L01_P004" (hatched 90Degree grid 0.508 track 0.203, pour order 4): 24.714,11.43 15.748,11.43 15.24,11.938 15.24,14.605 12.827,14.605 12.446,14.224 9.779,14.224 9.779,12.319 11.176,10.922 24.714,10.922
3.3VCC on Top Layer "3.3VCC_L01_P006" (hatched 90Degree grid 0.508 track 0.203, pour order 6): 9.017,18.161 9.144,18.034 12.446,18.034 12.573,18.161 13.716,18.161 14.224,18.669 14.224,24.511 12.192,24.511 9.017,21.336
5VIN- on Top Layer "5VIN-_L01_P001" (solid, pour order 1): 35.56,16.637 36.068,16.129 36.068,13.335 35.052,12.319 30.353,12.319 29.718,12.954 29.718,14.732 30.353,15.367 34.544,15.367 34.671,15.494 34.544,15.621 34.544,16.637
5VIN- on Bottom Layer "5VIN-_L02_P021" (hatched 90Degree grid 0.508 track 0.203, pour order 21): 22.733,96.52 23.495,95.758 29.718,95.758 32.258,98.298 38.862,98.298 38.862,94.742 38.735,94.615 23.495,94.615 22.733,93.853
3.3VCC on Bottom Layer "3.3VCC_L02_P018" (hatched 90Degree grid 0.508 track 0.203, pour order 18): 36.703,59.182 36.703,60.96 35.433,62.23 33.274,62.23 31.623,60.579 29.845,60.579 29.845,62.738 29.972,62.865 29.972,65.913 30.099,66.04 35.56,66.04 38.989,62.611 40.132,62.611
3.3VCC on Bottom Layer "3.3VCC_L02_P016" (hatched 90Degree grid 0.508 track 0.203, pour order 16): 29.21,87.884 29.21,94.107 36.576,94.107 52.324,78.359 52.324,65.532 46.736,59.944 42.418,59.944 39.497,57.023 39.497,49.276 37.973,47.752 37.973,33.401 31.369,26.797 22.733,26.797 16.764,20.828 9.144,20.828 9.144,23.241 11.43,25.527 13.589,25.527 14.732,24.384 18.415,24.384 18.669,24.638 18.669,27.305 22.352,30.988 30.734,30.988 31.623,31.877 31.623,49.911 35.306,49.911 36.703,51.308 36.703,59.182 40.132,62.611 44.831,62.611 49.53,67.31 49.53,78.359 37.084,90.805 33.655,90.805 33.147,90.297 33.147,86.741 30.353,86.741
5VIN- on Bottom Layer "5VIN-_L02_P017" (hatched 90Degree grid 0.508 track 0.203, pour order 17): 29.007,60.071 29.21,59.868 31.623,59.868 31.767,59.927 31.767,59.928 33.612,61.773 35.095,61.773 36.119,60.749 36.119,59.868 36.068,59.817 36.068,52.197 35.56,51.689 32.512,51.689 30.988,50.165 30.988,40.894 30.734,40.64 30.099,40.64 29.337,39.878 29.337,33.401 27.94,32.004 22.352,32.004 17.907,27.559 17.907,24.892 15.621,24.892 14.605,25.781 14.605,26.162 10.795,26.162 8.89,24.257 7.62,24.257 5.461,26.416 5.461,96.52 22.733,96.52 22.733,87.63 27.813,82.55 34.163,82.55 34.163,89.027 37.719,89.027 44.831,81.915 44.831,64.262 44.069,63.5 40.038,63.5 36.72,66.818 36.72,66.819 36.576,66.878 29.21,66.878 29.007,66.675
5VIN- on Bottom Layer "5VIN-_L02_P000" (hatched 90Degree grid 0.508 track 0.203, pour order 0): 53.975,17.78 55.753,16.002 55.753,12.7 54.483,11.43 18.796,11.43 17.399,12.827 17.399,15.621 19.558,17.78

## Keep-outs
Keep-Out Layer:
  the board outline again, w0.3

## Silkscreen, mask and mechanical layers (free items; w line width, h text height)
Top Overlay:
  lines w0.12: 15,0 15,10 65,10 65,0
  lines w0.203: 71.501,87.63 71.501,97.917 76.581,97.917 76.581,87.63 ; 71.501,93.853 76.581,93.853 ; 71.628,96.139 76.581,96.139 ; 29.337,92.964 29.337,99.822 39.116,99.822 39.116,94.488 39.497,94.107 43.561,94.107 43.561,91.694 38.862,91.694 38.862,92.964 29.337,92.964
Mechanical 1:
  the board outline again, w0.3

## Text inside footprints (layer, text, board x,y; h text height)
C13: Top Overlay "+" at 72.771,21.092 h0.7
C21: Top Overlay "+" at 64.643,19.822 h0.7
D1: Top Overlay "+" at 28.321,96.139 h0.76 r180
U1: Top Overlay "VIN-" at 60.833,16.256 h0.7 r180; Top Overlay "VIN+" at 60.706,23.495 h0.7 r180; Top Overlay "VO+" at 50.8,22.225 h0.7 r180; Top Overlay "VO-" at 50.927,17.145 h0.7 r180